# Altium PCB DE-130418.PcbDoc
Units mil, origin at the board's own origin, x right, y up, seen from the top; angles counter-clockwise.
Board outline 1600 x 2120 mil, 2 copper layers (Top Layer, Bottom Layer); 22 components, 21 nets, 68 pads, 0 vias.
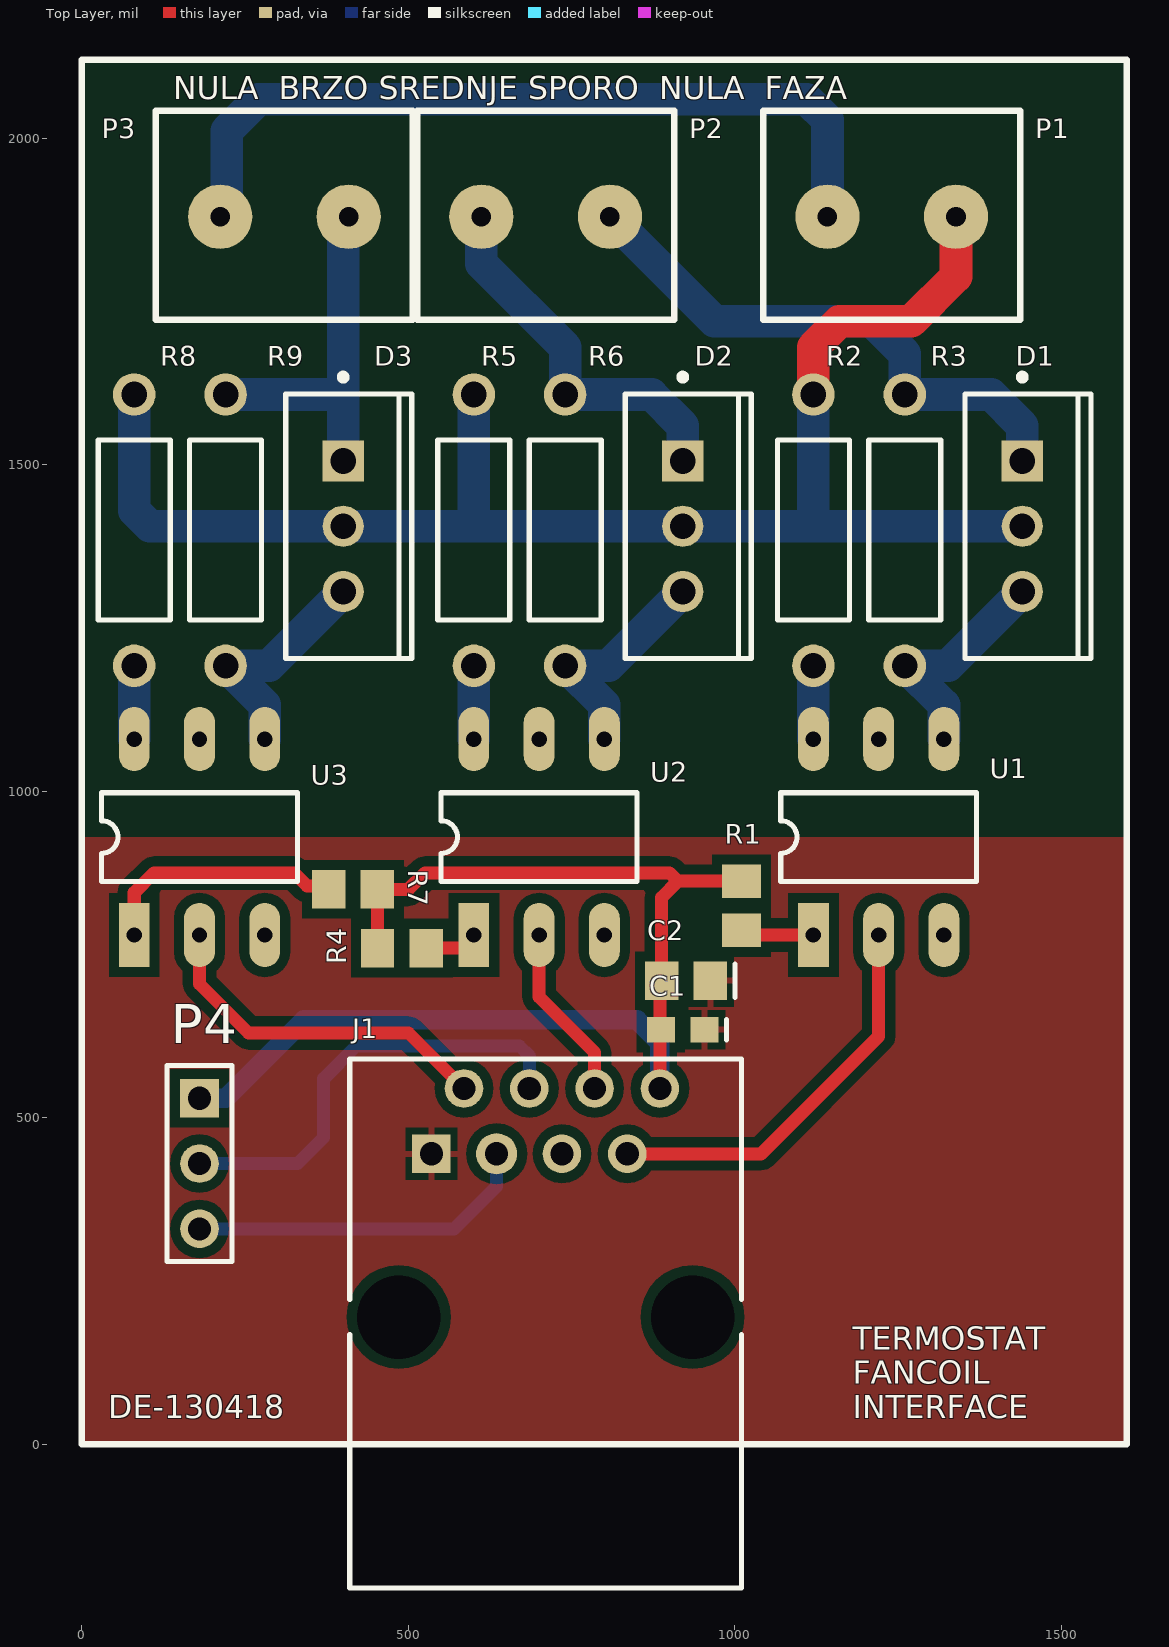
[diagram p0: Top Layer view]
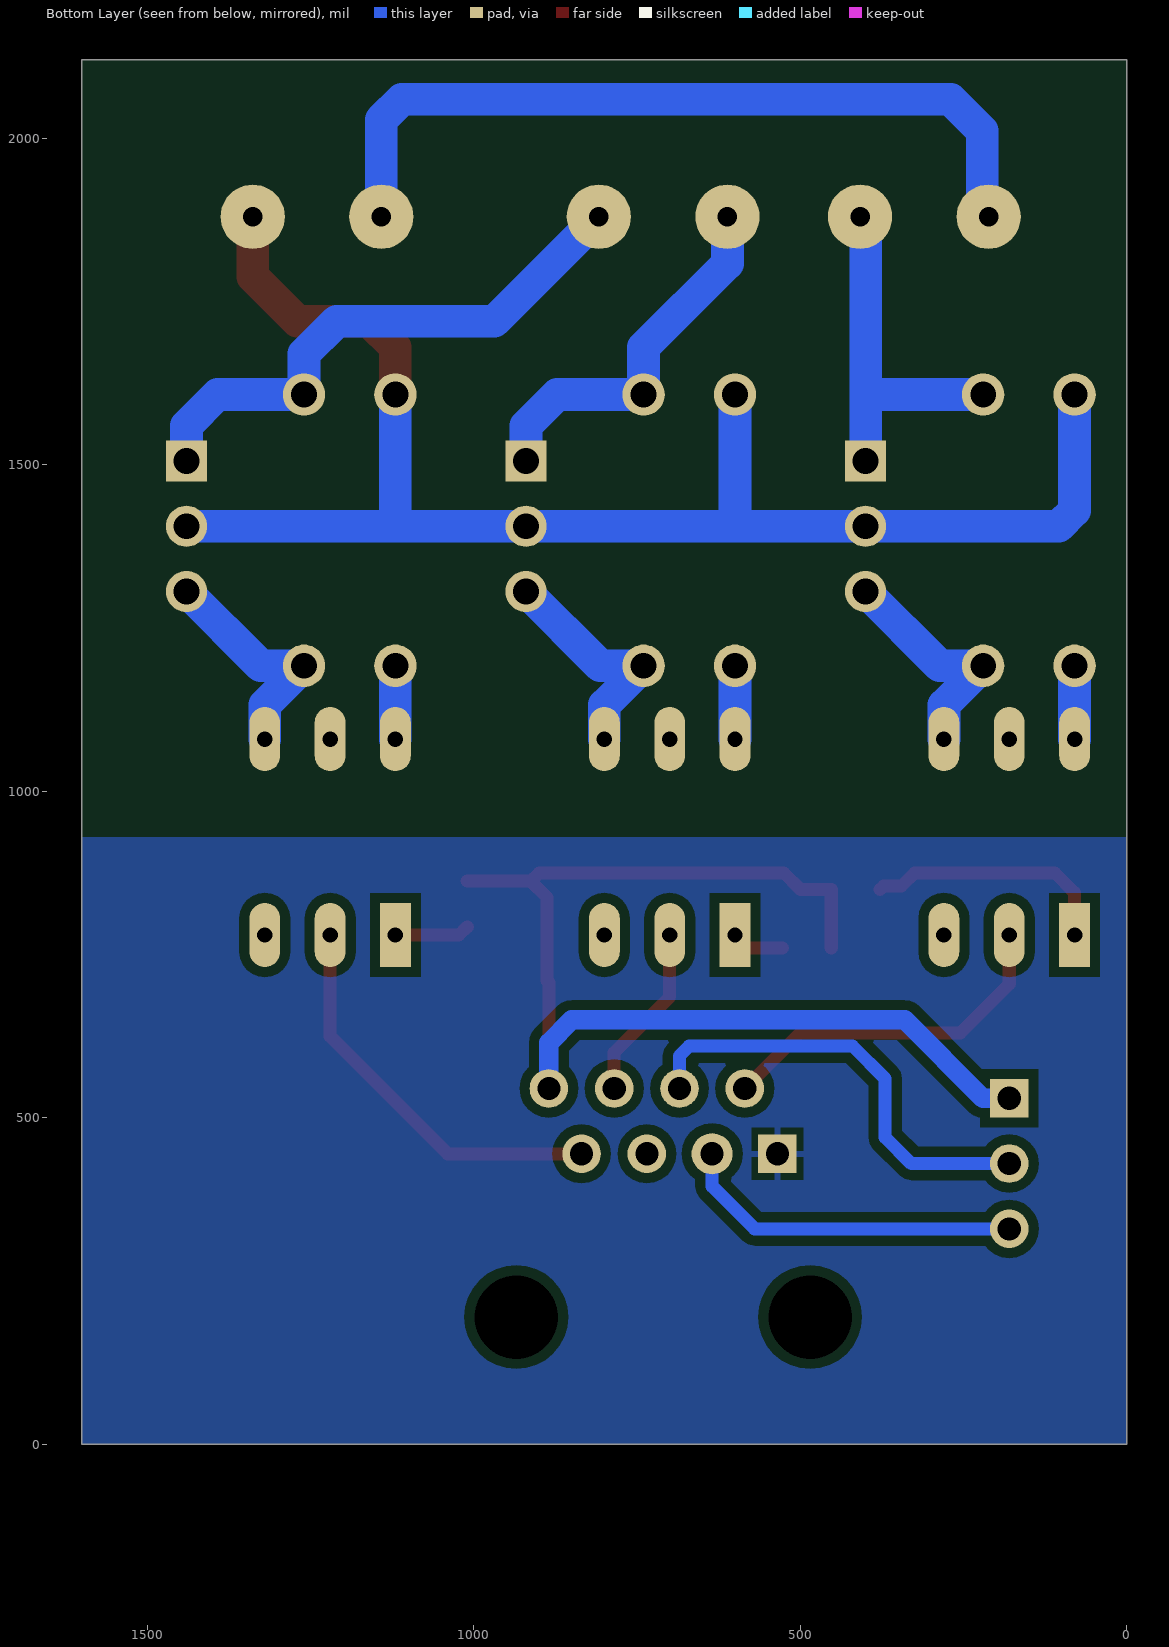
[diagram p1: Bottom Layer view, seen from below]

## Layer stack, top to bottom
Top Solder: solder mask 0.4, Solder Resist, Dk 3.5
Top Layer: signal copper 1.4
Dielectric 1: dielectric 12.6, FR-4, Dk 4.8
Bottom Layer: signal copper 1.4
Bottom Solder: solder mask 0.4, Solder Resist, Dk 3.5

## Board outline
0,0 0,2120 1600,2120 1600,0

## Design rules (kind name [scope] priority, off if disabled: settings)
Clearance [All] p1: gap=10 except(15: Arc-Poly Track-Poly SMDPad-Poly THPad-Poly Via-Poly Fill-Poly Poly-Poly)
PolygonConnect [All] p1: connectstyle=Relief reliefconductorwidth=10 reliefentries=4 polygonreliefangle="90 Angle" airgapwidth=10
RoutingVias [All] p1: holewidth=28 width=50 viastyle="Through Hole" minholewidth=28 minwidth=50 maxholewidth=28 maxwidth=50
SolderMaskExpansion [All] p1: expansion=4
Width [All] p1: maxlimit=200 minlimit=10 preferedwidth=30
30 further rules are at their usual default settings.

## Components (designator, comment, footprint, x,y, rotation, side; value= is the part's Value field where it differs from the comment)
C1 "100nF" 0603 920,635 r180 top
C2 "4u7" 0805 925,710 r180 top
D1 "BTA16-600" ONSC-TO-220-3-221A-07 1440,1405.97 r0 top
D2 "BTA16-600" ONSC-TO-220-3-221A-07 920,1405.97 r0 top
D3 "BTA16-600" ONSC-TO-220-3-221A-07 400,1405.97 r0 top
J1 "15-43-8501" 15-43-8501 710,-220 r0 top
P1 "220VAC" "TERMINAL BLOK 2" 1240,1880 r90 top
P2 "" "TERMINAL BLOK 2" 710,1880 r90 top
P3 "" "TERMINAL BLOK 2" 310,1880 r90 top
P4 "AUX" HDR1X3 180,530 r270 top
R1 "330R" ERA-0805 1010,825 r90 top
R2 "360R" RD6.35x2.3 1120,1400 r90 top
R3 "360R" RD6.35x2.3 1260,1400 r90 top
R4 "330R" ERA-0805 490,760 r180 top
R5 "360R" RD6.35x2.3 600,1400 r90 top
R6 "360R" RD6.35x2.3 740,1400 r90 top
R7 "330R" ERA-0805 415,850 r0 top
R8 "360R" RD6.35x2.3 80,1400 r90 top
R9 "360R" RD6.35x2.3 220,1400 r90 top
U1 "MOC3081" DIP6 1120,780 r90 top
U2 "MOC3081" DIP6 600,780 r90 top
U3 "MOC3081" DIP6 80,780 r90 top

## Footprints (in the part's own frame and the unit in brackets; to place one, negate y for a bottom-side part, rotate by r counter-clockwise, add the part's x,y. Pads: shape width x height; smd on the part's side, far side on the other; paste and mask are expansions set on the pad)
15-43-8501 [mm] "Connector; PCB Jack, Thru-Hole; 1-Port; Unshielded without Lightpipes; Right Angle"
  rect 1.5x1.5 hole 0.9: 1(-4.445,16.89)
  round 1.5 hole 0.9: 2(-3.175,19.43) 4(-0.635,19.43) 5(0.635,16.89) 6(1.905,19.43) 7(3.175,16.89) 8(4.445,19.43)
  round 1.6 hole 0.9: 3(-1.905,16.89)
  round 2.95 hole 3.25 unplated: MH1(-5.715,10.54) MH2(5.715,10.54)
  silkscreen extent -7.62,0 7.62,20.58
0603 [mm] "Chip Capacitor; Body 1.6 x 0.8 mm (LxW typ)"
  rect 1.1x1 smd: 1(-0.85,0) 2(0.85,0)
  silkscreen extent -1.7,-0.4 -1.7,0.4, body extent -1.8,-0.6 1.5,0.6, height 0.87
0805 [mm] "Chip Capacitor; Body 2.0 x 1.2 mm (LxW typ)"
  rect 1.3x1.5 smd: 1(-0.95,0) 2(0.95,0)
  silkscreen extent -1.9,-0.65 -1.9,0.65
DIP6 [mm]
  rect 2.5x1.2 hole 0.6: 1(0,0)
  oval 2.5x1.2 hole 0.6: 2(0,-2.54) 3(0,-5.08) 4(7.62,-5.08) 5(7.62,-2.54) 6(7.62,0)
  silkscreen extent 2.08,-6.35 5.54,1.27, body extent 0.63,-6.48 6.98,1.27, height 1
ERA-0805 [mm] "Chip Resistor; Body 2 x 1.3 mm (LxW typ)"
  rect 1.3x1.5 smd: 1(-0.95,0) 2(0.95,0)
HDR1X3 [mm] "Connector; Header; 3 Position"
  rect 1.5x1.5 hole 0.9: 1(0,0)
  round 1.5 hole 0.9: 2(2.54,0) 3(5.08,0)
  silkscreen extent -1.27,-1.27 6.35,1.27
ONSC-TO-220-3-221A-07 [mm] "FM, 3-Leads, Body 10.3x4.85mm, Pitch 2.54mm"
  rect 1.6x1.6 hole 1: 1(0,2.54)
  round 1.6 hole 1: 2(0,0) 3(0,-2.54)
  silkscreen extent -2.23,-5.15 2.67,5.92, body extent -2.21,-5.15 2.64,5.15, height 19.68
RD6.35x2.3 [mm] "Resistor, Axial; Body 7 x 2.8 mm (LxDia. max), Lead Dia. 0.65 mm (max)"
  round 1.65 hole 1: 1(-5.275,0) 2(5.275,0)
  silkscreen extent -3.5,-1.4 3.5,1.4
"TERMINAL BLOK 2" [mm] "Terminal blok 5mm"
  round 2.5 hole 0.762: 1(0,-2.5) 2(0,2.5)
  silkscreen extent -4,-5 4.13,5

## Part data
C1: library part C0603, "Ceramic Chip Capacitor - Standard"
C2: library part C0805, "Ceramic Chip Capacitor - Standard"
D1 D2 D3: library part BTA08-600BW3G, "Triacs, Silicon Bidirectional Thyristor, 3-Pin TO-220, Pb-Free, Tube"
J1: "Right Angle, Standard Profile, RJ-45 Keyed, Unshielded PCB Jack"
P1 P2 P3: library part "TERMINAL BLOK 2", "Terminal blok konektor 5 mm"
P4: library part "Header 3", "Header, 3-Pin"
R1 R4 R7: library part ERAS, "Metal Film Thermosensitive Chip Resistor, 0.56 Ohm to 10k Ohm Range, 5% Tolerance, 0805 Size, 0.1 W"
R2 R3 R5 R6 R8 R9: library part ERDS1T, "Carbon Film Resistor, 1 Ohm to 3.3M Ohm Range, 5% Tolerance, 0.5 W"
U1 U2 U3: "Zero-Cross Optoisolator Triac Driver"

## Nets (pads, with @x,y where several pads share a name; then routed paths per layer and width w, separated by ;. In a path a pad name is that pad's centre, name@x,y a point inside that pad or via, vN(x,y) a via of type N, cw(c..) or ccw(c..) an arc to the next point about the centre after c; other vN are vias at no path point)
+5V: C1.2 C2.2 J1.8 P4.1 R1.2 R4.2 R7.2 | length 1831
  Top Layer w20: R4.2 452.6,849.8 499.8,849.8 525,875 900,875 912.6,862.4 ; J1.8 885,707.4 C2.2 887.6,837.4 912.6,862.4 ; R1.2 912.6,862.4
  Bottom Layer w30: P4.1 220,530 340,650 850,650 885,615 J1.8
COOLING_VALVE: J1.4 P4.2 | length 688.5
  Bottom Layer w20: P4.2 330,430 370,470 370,560 420,610 670,610 685,595 J1.4
FAN_HIGH_SPEED: J1.2 U3.2 | length 546.3
  Top Layer w20: U3.2 180,705 255,630 499.96,630 J1.2
FAN_LOW_SPEED: J1.7 U1.2 | length 614.6
  Top Layer w20: J1.7 1039.96,444.96 1220,625 U1.2
FAN_MIDDLE_SPEED: J1.6 U2.2 | length 270.2
  Top Layer w20: U2.2 700,685 785,600 J1.6
GND: C1.1 C2.1 J1.1
HEATING_VALVE: J1.3 P4.3 | length 531.9
  Bottom Layer w20: P4.3 570,330 635,395 J1.3
LIVE: D1.2 D2.2 D3.2 P1.1 R2.2 R5.2 R8.2 | length 2368.3
  Top Layer w50: R2.2 1120,1680 1160,1720 1270,1720 1338.43,1788.43 P1.1
  Bottom Layer w50: R8.2 80,1430 104.03,1405.97 D3.2 600,1405.97 ; R5.2 600,1405.97 ; 1120,1415.97 R2.2 ; D1.2 D2.2 600,1405.97
NetD1_1: D1.1 P2.1 R3.2 | length 854.7
  Bottom Layer w50: P2.1 968.43,1720 1210,1720 1260,1670 R3.2 1392.32,1607.68 1440,1560 D1.1
NetD1_3: D1.3 R3.1 U1.4 | length 364.2
  Bottom Layer w50: U1.4 1320,1132.32 R3.1 1326.35,1192.32 D1.3
NetD2_1: D2.1 P2.2 R6.2 | length 579.3
  Bottom Layer w50: P2.2 611.57,1808.43 740,1680 R6.2 872.32,1607.68 920,1560 D2.1
NetD2_3: D2.3 R6.1 U2.4 | length 364.2
  Bottom Layer w50: U2.4 800,1132.32 R6.1 806.35,1192.32 D2.3
NetD3_1: D3.1 P3.1 R9.2 | length 564.8
  Bottom Layer w50: R9.2 392.32,1607.68 400,1600 ; D3.1 400,1600 ; P3.1@418.43,1880 400,1861.57 400,1600
NetD3_3: D3.3 R9.1 U3.4 | length 364.2
  Bottom Layer w50: U3.4 280,1132.32 R9.1 286.35,1192.32 D3.3
NetR1_1: R1.1 U1.1 | length 115.2
  Top Layer w20: R1.1@1010,792.6 1022.6,780 U1.1
NetR2_1: R2.1 U1.6 | length 112.3
  Bottom Layer w50: U1.6 R2.1
NetR4_1: R4.1 U2.1 | length 52.6
  Top Layer w20: R4.1 U2.1@580,760
NetR5_1: R5.1 U2.6 | length 112.3
  Bottom Layer w50: U2.6 R5.1
NetR7_1: R7.1 U3.1 | length 385.4
  Top Layer w20: U3.1 80,845 110,875 325,875 345,855 372.6,855 R7.1
NetR8_1: R8.1 U3.6 | length 112.3
  Bottom Layer w50: U3.6 R8.1
NEUTRAL: P1.2 P3.2 | length 1233.1
  Bottom Layer w50: P3.2@221.57,1880 221.57,2011.57 270,2060 1110,2060 1141.57,2028.43 P1.2
pads on no net: J1.5 J1.MH1 J1.MH2 U1.3 U1.5 U2.3 U2.5 U3.3 U3.5

## Polygon pours and split planes (outlines as drawn)
GND on Top Layer "Bottom Layer-No Net" (solid, remove dead copper, pour order 0): 0,930 1600,930 1600,0 0,0 0,930
GND on Bottom Layer "Bottom Layer-No Net" (solid, remove dead copper, pour order 2): 0,930 1600,930 1600,0 0,0 0,930

## Silkscreen, mask and mechanical layers (free items; w line width, h text height)
Top Overlay:
  the board outline again, w10
  text "NULA  BRZO SREDNJE SPORO  NULA  FAZA" at 140,2060 h35
  text "DE-130418" at 40,40 h35
  text "TERMOSTAT / FANCOIL  / INTERFACE" at 1180,40 h35